# Altium PCB SPT3G_LCBoardRev0.PcbDoc (part 3 of 3)
Units mil, origin at the board's own origin, x right, y up, seen from the top; angles counter-clockwise.
Board outline 7438.98 x 1969 mil, 6 copper layers (Top Layer, Signal Layer 1, Internal Plane 1, Internal Plane 2, Signal Layer 2, Bottom Layer), stack 61.6 mil thick; 29 components, 149 nets, 701 pads, 136 vias.
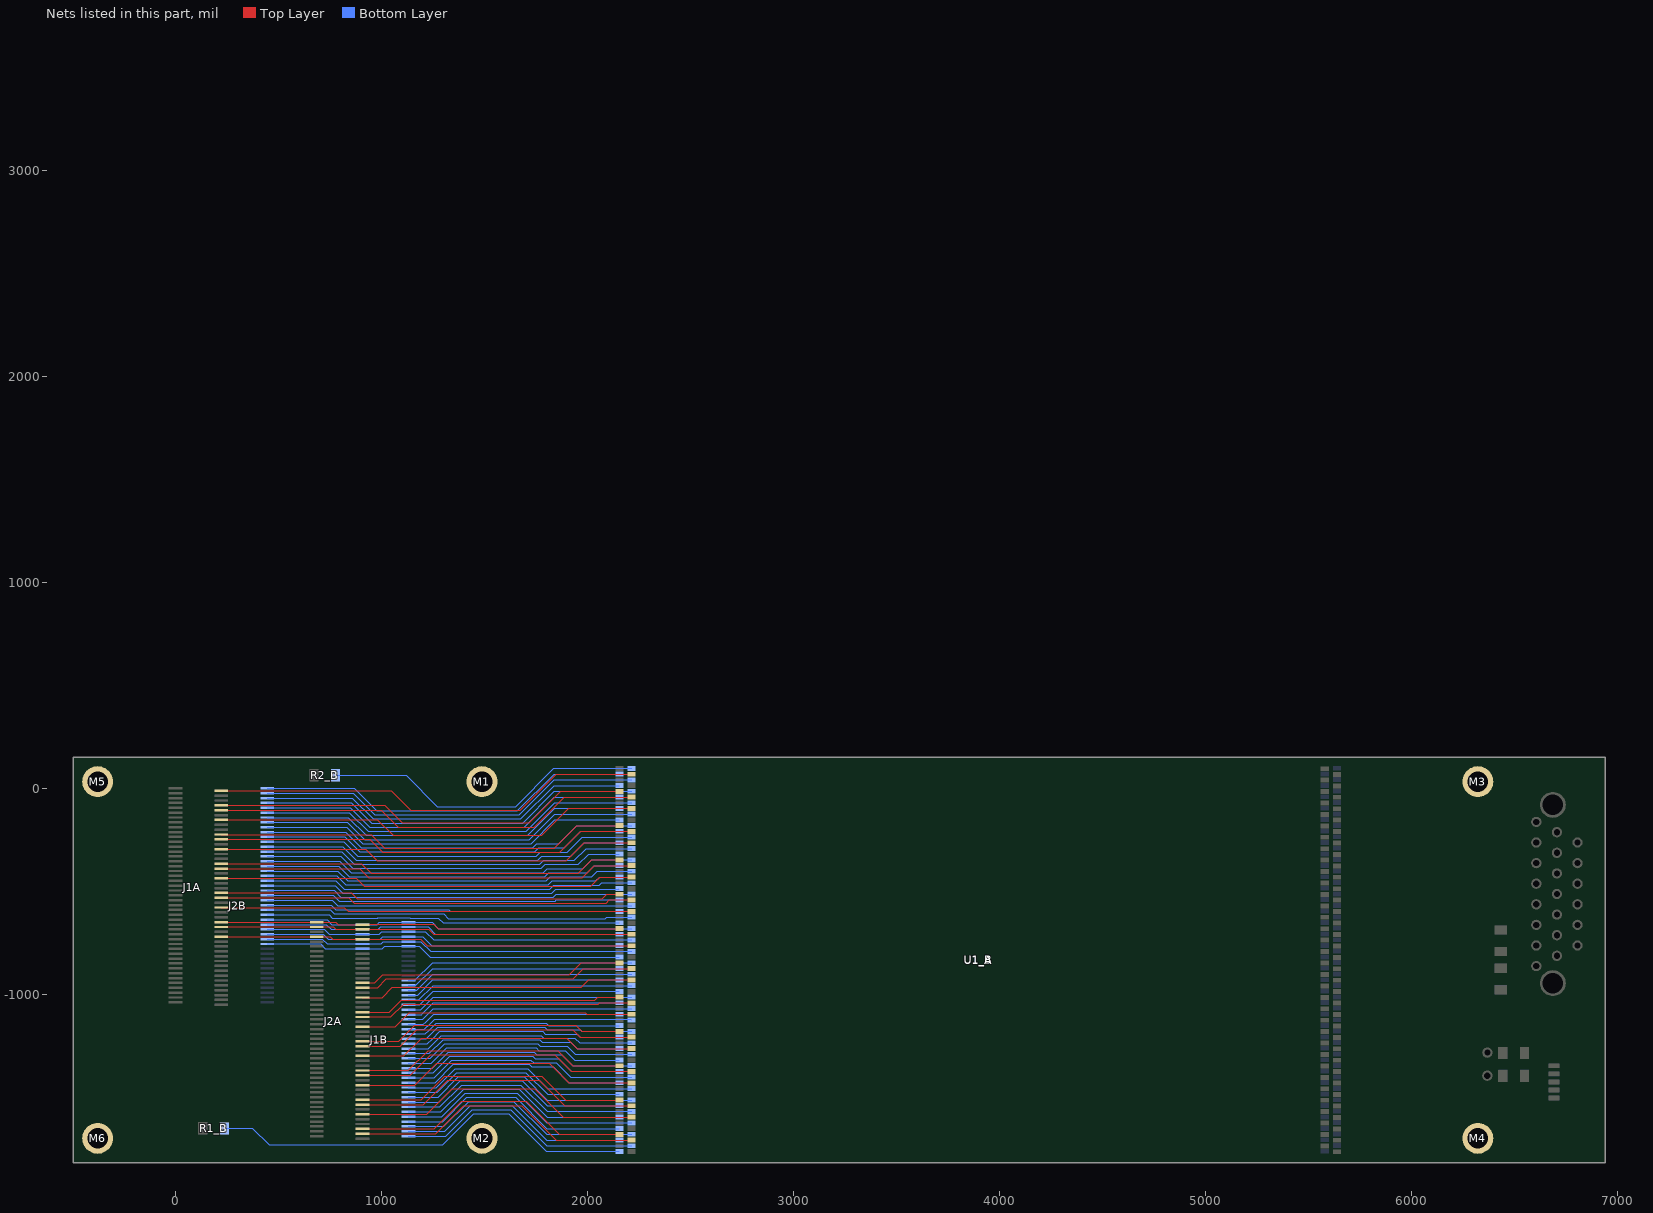
[diagram p7: the nets of this part, all layers, seen from the top]

## Via types
v1: diameter 20, hole 10, Top Layer to Bottom Layer, 136 vias

## Nets (pads, with @x,y where several pads share a name; then routed paths per layer and width w, separated by ;. In a path a pad name is that pad's centre, name@x,y a point inside that pad or via, vN(x,y) a via of type N, cw(c..) or ccw(c..) an arc to the next point about the centre after c; other vN are vias at no path point) (continued)
FREQA35: J1A.22 U1_A.12 | length 2059.8
  Top Layer w6: J1A.22@222.44,-248.03 942.53,-248.03 1005.5,-311.01 1864.88,-311.01 1966.89,-209 U1_A.12@2213.86,-209
FREQA36: J2A.32 U1_A.38 | length 1340.7
  Top Layer w6: J2A.32@908.43,-1015.75 1003.26,-1015.75 1052.32,-966.69 1969.58,-966.69 2005.61,-930.65 U1_A.38@2213.86,-930.65
FREQA37: J1A.34 U1_A.18 | length 2033.9
  Top Layer w6: J1A.34@222.44,-389.76 894.19,-389.76 938.38,-433.95 1975.72,-433.95 2034.13,-375.54 U1_A.18@2213.86,-375.54
FREQA38: J2A.44 U1_A.44 | length 1336.7
  Top Layer w6: J2A.44@908.43,-1157.48 1066.87,-1157.48 1134.72,-1089.63 1990,-1089.63 1997.56,-1097.19 U1_A.44@2213.86,-1097.19
FREQA39: J1A.14 U1_A.8 | length 2077
  Top Layer w6: J1A.14@222.44,-153.54 980.61,-153.54 1056.11,-229.05 1777.38,-229.05 1908.45,-97.98 U1_A.8@2213.86,-97.98
FREQA40: J1A.62 J2A.7 J2A.8 U1_A.32 | length 2009.5
  Top Layer w6: J1A.62@222.44,-720.47 J2A.7@685.98,-720.47 751.98,-720.47 763.79,-732.28 1190.68,-732.28 1222.51,-764.12 U1_A.32@2213.86,-764.12
FREQA41: J2A.68 U1_A.56 | length 1388.3
  Top Layer w6: J2A.68@908.43,-1440.94 1162.41,-1440.94 1267.84,-1335.51 1815.7,-1335.51 1910.45,-1430.26 U1_A.56@2213.86,-1430.26
FREQA42: J2A.80 U1_A.62 | length 1414.2
  Top Layer w6: J2A.80@908.43,-1582.68 1220.3,-1582.68 1344.52,-1458.45 1744.28,-1458.45 1882.62,-1596.8 U1_A.62@2213.86,-1596.8
FREQA43: J1A.58 J2A.3 J2A.4 U1_A.30 | length 2006.1
  Top Layer w6: J1A.58@222.44,-673.23 J2A.3@685.98,-673.23 766.95,-673.23 778.76,-685.04 J2A.4@908.43,-685.04 1229.12,-685.04 1252.68,-708.61 U1_A.30@2213.86,-708.61
FREQA44: J2A.56 U1_A.50 | length 1362.5
  Top Layer w6: J2A.56@908.43,-1299.21 1108.66,-1299.21 1195.3,-1212.57 1899.57,-1212.57 1950.72,-1263.72 U1_A.50@2213.86,-1263.72
FREQA45: J1A.10 U1_A.6 | length 2085.6
  Top Layer w6: J1A.10@222.44,-106.3 999.23,-106.3 1081,-188.07 1742.62,-188.07 1888.22,-42.46 U1_A.6@2213.86,-42.46
FREQA46: J2A.28 U1_A.36 | length 1344.1
  Top Layer w6: J2A.28@908.43,-968.5 981.37,-968.5 1024.16,-925.71 1930.3,-925.71 1980.87,-875.14 U1_A.36@2213.86,-875.14
FREQA47: J2A.40 U1_A.42 | length 1333.8
  Top Layer w6: J2A.40@908.43,-1110.24 1045.4,-1110.24 1106.99,-1048.65 2053.03,-1048.65 2060,-1041.68 U1_A.42@2213.86,-1041.68
FREQA48: J1A.38 U1_A.20 | length 2025.3
  Top Layer w6: J1A.38@222.44,-437.01 877.8,-437.01 915.72,-474.93 2015.01,-474.93 2058.89,-431.05 U1_A.20@2213.86,-431.05
FREQA49: J2A.52 U1_A.48 | length 1353.9
  Top Layer w6: J2A.52@908.43,-1251.97 1090.9,-1251.97 1171.28,-1171.59 1929.23,-1171.59 1965.85,-1208.21 U1_A.48@2213.86,-1208.21
FREQA50: J1A.46 U1_A.24 | length 2008.1
  Top Layer w6: J1A.46@222.44,-531.5 841.68,-531.5 867.07,-556.89 2091.26,-556.89 2106.08,-542.07 U1_A.24@2213.86,-542.07
FREQA51: J1A.2@222.44,-11.81 U1_A.2 | length 2102.8
  Top Layer w6: J1A.2@222.44,-11.81 1047.08,-11.81 1141.38,-106.11 1673.08,-106.11 1847.75,68.56 U1_A.2@2213.86,68.56
FREQA52: J2A.64 U1_A.54 | length 1379.7
  Top Layer w6: J2A.64@908.43,-1393.7 1139.65,-1393.7 1238.82,-1294.53 1841.47,-1294.53 1921.69,-1374.75 U1_A.54@2213.86,-1374.75
FREQA53: J1A.50 U1_A.26 | length 1999.2
  Top Layer w6: J1A.50@222.44,-578.74 819.15,-578.74 837.99,-597.58 U1_A.26@2213.86,-597.58
FREQA54: J2A.86 U1_A.65 | length 1368.1
  Top Layer w6: J2A.86@908.43,-1653.54 1255.06,-1653.54 1388.67,-1519.92 1703.09,-1519.92 1863.23,-1680.06 U1_A.65@2154.8,-1680.06
FREQA55: J1A.56 J2A.1 J2A.2@908.43,-661.42 U1_A.29 | length 1947
  Top Layer w6: J1A.56@222.44,-649.61 J2A.1@685.98,-649.61 777.32,-649.61 789.13,-661.42 J2A.2@908.43,-661.42 910.5,-659.34 1254.06,-659.34 1275.57,-680.85 U1_A.29@2154.8,-680.85
FREQA56: J2A.74 U1_A.59 | length 1342.2
  Top Layer w6: J2A.74@908.43,-1511.81 1193.54,-1511.81 1308.37,-1396.98 1777.09,-1396.98 1893.64,-1513.53 U1_A.59@2154.8,-1513.53
FREQA57: J2A.76 U1_A.60 | length 1405.6
  Top Layer w6: J2A.76@908.43,-1535.43 1202.6,-1535.43 1320.56,-1417.47 1766.07,-1417.47 1889.88,-1541.28 U1_A.60@2213.86,-1541.28
FREQA58: J1A.20 U1_A.11 | length 2005
  Top Layer w6: J1A.20@222.44,-224.41 949.38,-224.41 1015.49,-290.52 1839.63,-290.52 1948.91,-181.24 U1_A.11@2154.8,-181.24
FREQA59: J1A.26 U1_A.14 | length 2051.1
  Top Layer w6: J1A.26@222.44,-295.28 923.46,-295.28 980.17,-351.99 1896.8,-351.99 1984.28,-264.51 U1_A.14@2213.86,-264.51
FREQA60: J2A.50 U1_A.47 | length 1290.5
  Top Layer w6: J2A.50@908.43,-1228.35 1084.52,-1228.35 1161.77,-1151.1 1943.57,-1151.1 1972.92,-1180.46 U1_A.47@2154.8,-1180.46
FREQA61: J1A.32 U1_A.17 | length 1979.2
  Top Layer w6: J1A.32@222.44,-366.14 902.34,-366.14 949.66,-413.46 1954.5,-413.46 2020.17,-347.78 U1_A.17@2154.8,-347.78
FREQA62: J2A.38 U1_A.41 | length 1276.5
  Top Layer w6: J2A.38@908.43,-1086.61 1037.28,-1086.61 1095.73,-1028.16 2034.66,-1028.16 2048.9,-1013.92 U1_A.41@2154.8,-1013.92
FREQA63: J2A.62 U1_A.53 | length 1316.4
  Top Layer w6: J2A.62@908.43,-1370.08 1130.79,-1370.08 1226.83,-1274.04 1856,-1274.04 1928.95,-1346.99 U1_A.53@2154.8,-1346.99
FREQA64: J2A.88 U1_A.66 | length 1431.4
  Top Layer w6: J2A.88@908.43,-1677.17 1263.37,-1677.17 1400.12,-1540.41 1680.63,-1540.41 1848.03,-1707.82 U1_A.66@2213.86,-1707.82
FREQA65: J1A.8 U1_A.5 | length 2030.8
  Top Layer w6: J1A.8@222.44,-82.68 1015.8,-82.68 1100.7,-167.58 1230,-167.58 1520,-167.58 1718.01,-167.58 1870.87,-14.71 U1_A.5@2154.8,-14.71
FREQA66: J1A.44 U1_A.23 | length 1953.3
  Top Layer w6: J1A.44@222.44,-507.87 852.66,-507.87 881.19,-536.4 2071.15,-536.4 2093.23,-514.31 U1_A.23@2154.8,-514.31
FREQA67: J2A.26 U1_A.35 | length 1286.8
  Top Layer w6: J2A.26@908.43,-944.88 967.64,-944.88 1007.3,-905.22 1912.36,-905.22 1970.2,-847.39 U1_A.35@2154.8,-847.39
FREQB0: J2B.46 U1_B.45 | length 1725.1
  Bottom Layer w6: J2B.46@444.88,-519.69 764.99,-519.69 794.2,-548.9 1842.63,-548.9 1849.47,-542.07 U1_B.45@2155,-542.07
FREQB1: J1B.89 J1B.90 J2B.36 U1_B.40 | length 1798.3
  Bottom Layer w6: J2B.36@444.88,-637.8 735.94,-637.8 759.56,-661.42 J1B.89@908.43,-661.42 ; J1B.89@910.5,-659.34 J1B.89@908.43,-661.42 ; J1B.90@1130.87,-649.61 1129.63,-650.84 989.23,-650.84 978.66,-661.42 J1B.89@908.43,-661.42 ; J1B.90@1131.91,-650.65 1245.37,-650.65 1275.57,-680.85 U1_B.40@2214.06,-680.85
FREQB2: J1B.24 U1_B.13 | length 1097.9
  Bottom Layer w6: J1B.24@1130.87,-1429.13 1260.42,-1429.13 1348.86,-1340.7 1717.66,-1340.7 1730.03,-1353.07 1833.26,-1353.07 1910.45,-1430.26 U1_B.13@2155,-1430.26
FREQB3: J1B.52 U1_B.27 | length 1047.6
  Bottom Layer w6: J1B.52@1130.87,-1098.43 1194.54,-1098.43 1198.17,-1094.8 1198.77,-1094.8 1251.9,-1041.68 U1_B.27@2155,-1041.68
FREQB4: J1B.64 U1_B.33 | length 1057.9
  Bottom Layer w6: J1B.64@1130.87,-956.69 1167.18,-956.69 1248.73,-875.14 U1_B.33@2155,-875.14
FREQB5: J2B.72 U1_B.58 | length 1845.4
  Bottom Layer w6: J2B.72@444.88,-212.6 825.59,-212.6 901.9,-288.9 1734.94,-288.9 1754.6,-269.24 1860.91,-269.24 1948.91,-181.24 U1_B.58@2214.06,-181.24
FREQB6: J1B.30 U1_B.16 | length 1142.8
  Bottom Layer w6: J1B.30@1130.87,-1358.27 1246.43,-1358.27 1324,-1280.7 1742.51,-1280.7 1754.89,-1293.07 1875.02,-1293.07 1928.95,-1346.99 U1_B.16@2214.06,-1346.99
FREQB7: J2B.84 U1_B.64 | length 1873.7
  Bottom Layer w6: J2B.84@444.88,-70.87 853.57,-70.87 951.6,-168.9 1685.23,-168.9 1839.43,-14.71 U1_B.64@2214.06,-14.71
FREQB8: J1B.4 U1_B.3 | length 1145
  Bottom Layer w6: J1B.4@1130.87,-1665.35 1307.04,-1665.35 1431.7,-1540.7 1634.82,-1540.7 1801.94,-1707.82 U1_B.3@2155,-1707.82
FREQB9: J1B.16 U1_B.9 | length 1116.7
  Bottom Layer w6: J1B.16@1130.87,-1523.62 1279.07,-1523.62 1381.99,-1420.7 1684.52,-1420.7 1805.11,-1541.28 U1_B.9@2155,-1541.28
FREQB10: J2B.78 U1_B.61 | length 1800.5
  Bottom Layer w6: J2B.78@444.88,-141.73 839.58,-141.73 926.75,-228.9 1710.09,-228.9 1841.01,-97.98 U1_B.61@2155,-97.98
FREQB11: J1B.83 J1B.84 J2B.30 U1_B.37 | length 1742.9
  Bottom Layer w6: J2B.30@444.88,-708.66 717.5,-708.66 741.12,-732.28 J1B.83@908.43,-732.28 993.12,-732.28 1004.93,-720.47 J1B.84@1130.87,-720.47 1199.42,-720.47 1243.06,-764.12 U1_B.37@2155,-764.12
FREQB12: J1B.12 U1_B.7 | length 1126.1
  Bottom Layer w6: J1B.12@1130.87,-1570.87 1288.39,-1570.87 1398.56,-1460.7 1667.96,-1460.7 1804.05,-1596.8 U1_B.7@2155,-1596.8
FREQB13: J1B.36 U1_B.19 | length 1069.6
  Bottom Layer w6: J1B.36@1130.87,-1287.4 1232.45,-1287.4 1299.15,-1220.7 1767.37,-1220.7 1779.74,-1233.07 1920.07,-1233.07 1950.72,-1263.72 U1_B.19@2155,-1263.72
FREQB14: J2B.42 U1_B.43 | length 1722.4
  Bottom Layer w6: J2B.42@444.88,-566.93 755.66,-566.93 778.56,-589.83 965.39,-589.83 ; 965.61,-589.61 1155.72,-589.61 ; 1155.94,-589.83 1326.98,-589.83 1334.73,-597.58 U1_B.43@2155,-597.58
FREQB15: J2B.54 U1_B.49 | length 1743.9
  Bottom Layer w6: J2B.54@444.88,-425.2 783.63,-425.2 827.34,-468.9 1809.5,-468.9 1828.68,-449.72 2040.22,-449.72 2058.89,-431.05 U1_B.49@2155,-431.05
FREQB16: J1B.40 U1_B.21 | length 1060.2
  Bottom Layer w6: J1B.40@1130.87,-1240.16 1222.52,-1240.16 1247.87,-1214.8 1248.48,-1214.8 1282.58,-1180.7 1783.94,-1180.7 1796.31,-1193.07 1950.7,-1193.07 1965.85,-1208.21 U1_B.21@2155,-1208.21
FREQB17: J2B.66 U1_B.55 | length 1772.2
  Bottom Layer w6: J2B.66@444.88,-283.46 811.61,-283.46 877.05,-348.9 1759.79,-348.9 1778.98,-329.72 1919.07,-329.72 1984.28,-264.51 U1_B.55@2155,-264.51
FREQB18: J1B.48 U1_B.25 | length 1044.2
  Bottom Layer w6: J1B.48@1130.87,-1145.67 1203.87,-1145.67 1214.73,-1134.8 1215.34,-1134.8 1252.96,-1097.19 U1_B.25@2155,-1097.19
FREQB19: J1B.60 U1_B.31 | length 1054.5
  Bottom Layer w6: J1B.60@1130.87,-1003.94 1176.5,-1003.94 1249.79,-930.65 U1_B.31@2155,-930.65
FREQB20: J2B.90 U1_B.67 | length 1828.7
  Bottom Layer w6: J2B.90@444.88,0 867.55,0 976.46,-108.9 1660.38,-108.9 1837.84,68.56 U1_B.67@2155,68.56
FREQB21: J2B.58 U1_B.51 | length 1753.3
  Bottom Layer w6: J2B.58@444.88,-377.95 792.96,-377.95 843.91,-428.9 1792.93,-428.9 1812.11,-409.72 1999.95,-409.72 2034.13,-375.54 U1_B.51@2155,-375.54
FREQB22: J1B.6 U1_B.4 | length 1199.3
  Bottom Layer w6: J1B.6@1130.87,-1641.73 1302.38,-1641.73 1423.42,-1520.7 1643.1,-1520.7 1802.47,-1680.06 U1_B.4@2214.06,-1680.06
FREQB23: J1B.54 U1_B.28 | length 1108.4
  Bottom Layer w6: J1B.54@1130.87,-1074.8 1190.49,-1074.8 1251.37,-1013.92 U1_B.28@2214.06,-1013.92
FREQB24: J1B.18 U1_B.10 | length 1171.1
  Bottom Layer w6: J1B.18@1130.87,-1500 1274.41,-1500 1373.71,-1400.7 1692.81,-1400.7 1805.64,-1513.53 U1_B.10@2214.06,-1513.53
FREQB25: J1B.28 U1_B.15 | length 1088.4
  Bottom Layer w6: J1B.28@1130.87,-1381.89 1251.1,-1381.89 1332.29,-1300.7 1734.23,-1300.7 1746.6,-1313.07 1860.01,-1313.07 1921.69,-1374.75 U1_B.15@2155,-1374.75
FREQB26: J1B.87 J1B.88 J2B.34 U1_B.39 | length 1739.4
  Bottom Layer w6: J2B.34@444.88,-661.42 731.28,-661.42 754.9,-685.04 J1B.87@908.43,-685.04 983.42,-685.04 995.23,-673.23 J1B.88@1130.87,-673.23 1226.41,-673.23 1261.79,-708.61 U1_B.39@2155,-708.61
FREQB27: J2B.82 U1_B.63 | length 1809.9
  Bottom Layer w6: J2B.82@444.88,-94.49 848.91,-94.49 943.32,-188.9 1693.52,-188.9 1839.96,-42.46 U1_B.63@2155,-42.46
FREQB28: J1B.66 U1_B.34 | length 1118.7
  Bottom Layer w6: J1B.66@1130.87,-933.07 1162.52,-933.07 1248.2,-847.39 U1_B.34@2214.06,-847.39
FREQB29: J2B.48 U1_B.46 | length 1788.8
  Bottom Layer w6: J2B.48@444.88,-496.06 769.65,-496.06 802.49,-528.9 1834.35,-528.9 1848.94,-514.31 U1_B.46@2214.06,-514.31
FREQB30: J2B.70 U1_B.57 | length 1781.6
  Bottom Layer w6: J2B.70@444.88,-236.22 820.93,-236.22 893.61,-308.9 1743.22,-308.9 1762.88,-289.24 1886.65,-289.24 1966.89,-209 U1_B.57@2155,-209
FREQB31: J1B.42 U1_B.22 | length 1114.5
  Bottom Layer w6: J1B.42@1130.87,-1216.54 1217.85,-1216.54 1239.59,-1194.8 1240.19,-1194.8 1274.3,-1160.7 1792.22,-1160.7 1804.59,-1173.07 1965.53,-1173.07 1972.92,-1180.46 U1_B.22@2214.06,-1180.46
FREQB32: J2B.60 U1_B.52 | length 1817.1
  Bottom Layer w6: J2B.60@444.88,-354.33 797.62,-354.33 852.19,-408.9 1784.64,-408.9 1803.83,-389.72 1978.24,-389.72 2020.17,-347.78 U1_B.52@2214.06,-347.78
FREQB33: R1_B.2 U1_B.1 | length 2089.5
  Bottom Layer w6: R1_B.2@237.39,-1650.63 373.33,-1650.63 454.57,-1731.87 1297.1,-1731.87 1448.27,-1580.7 1618.25,-1580.7 1800.88,-1763.33 U1_B.1@2155,-1763.33
FREQB34: R2_B.2 U1_B.68 | length 1576.7
  Bottom Layer w6: R2_B.2@777.1,63.2 1119.29,63.2 1271.4,-88.9 1652.1,-88.9 1837.31,96.32 U1_B.68@2214.06,96.32
FREQB35: J1B.22 U1_B.12 | length 1161.6
  Bottom Layer w6: J1B.22@1130.87,-1452.76 1265.08,-1452.76 1357.14,-1360.7 1709.38,-1360.7 1806.7,-1458.02 U1_B.12@2214.06,-1458.02
FREQB36: J1B.85 J1B.86 J2B.32 U1_B.38 | length 1800.2
  Bottom Layer w6: J2B.32@444.88,-685.04 723.17,-685.04 746.79,-708.66 J1B.85@908.43,-708.66 988.46,-708.66 1000.27,-696.85 J1B.86@1130.87,-696.85 1213.1,-696.85 1252.61,-736.36 U1_B.38@2214.06,-736.36
FREQB37: J1B.34 U1_B.18 | length 1133.4
  Bottom Layer w6: J1B.34@1130.87,-1311.02 1237.11,-1311.02 1307.44,-1240.7 1759.08,-1240.7 1771.46,-1253.07 1901.61,-1253.07 1940.02,-1291.48 U1_B.18@2214.06,-1291.48
FREQB38: J2B.44 U1_B.44 | length 1780.3
  Bottom Layer w6: J2B.44@444.88,-543.31 760.32,-543.31 786.84,-569.83 957.11,-569.83 957.33,-569.61 1164,-569.61 1164.22,-569.83 U1_B.44@2214.06,-569.83
FREQB39: J1B.14 U1_B.8 | length 1180.5
  Bottom Layer w6: J1B.14@1130.87,-1547.24 1283.73,-1547.24 1390.28,-1440.7 1676.24,-1440.7 1804.58,-1569.04 U1_B.8@2214.06,-1569.04
FREQB40: J1B.62 U1_B.32 | length 1115.3
  Bottom Layer w6: J1B.62@1130.87,-980.31 1171.84,-980.31 1249.26,-902.9 U1_B.32@2214.06,-902.9
FREQB41: J2B.68 U1_B.56 | length 1835.9
  Bottom Layer w6: J2B.68@444.88,-259.84 816.27,-259.84 885.33,-328.9 1751.51,-328.9 1770.69,-309.72 1903.06,-309.72 1976.02,-236.76 U1_B.56@2214.06,-236.76
FREQB42: J2B.80 U1_B.62 | length 1864.2
  Bottom Layer w6: J2B.80@444.88,-118.11 844.24,-118.11 935.04,-208.9 1701.8,-208.9 1840.48,-70.22 U1_B.62@2214.06,-70.22
FREQB43: J1B.58 U1_B.30 | length 1111.8
  Bottom Layer w6: J1B.58@1130.87,-1027.56 1181.16,-1027.56 1250.31,-958.41 U1_B.30@2214.06,-958.41
FREQB44: J2B.56 U1_B.50 | length 1807.7
  Bottom Layer w6: J2B.56@444.88,-401.57 788.3,-401.57 835.63,-448.9 1801.21,-448.9 1820.4,-429.72 2021.97,-429.72 2048.4,-403.29 U1_B.50@2214.06,-403.29
FREQB45: J1B.10 U1_B.6 | length 1189.9
  Bottom Layer w6: J1B.10@1130.87,-1594.49 1293.06,-1594.49 1406.85,-1480.7 1659.67,-1480.7 1803.53,-1624.55 U1_B.6@2214.06,-1624.55
FREQB46: J1B.81 J1B.82 J2B.28 U1_B.36 | length 1803.6
  Bottom Layer w6: J2B.28@444.88,-732.28 712.33,-732.28 735.95,-755.91 J1B.81@908.43,-755.91 997.78,-755.91 1009.59,-744.09 J1B.82@1130.87,-744.09 1190.45,-744.09 1238.23,-791.87 U1_B.36@2214.06,-791.87
FREQB47: J2B.40 U1_B.42 | length 1790
  Bottom Layer w6: J2B.40@444.88,-590.55 751,-590.55 770.28,-609.83 973.68,-609.83 973.9,-609.61 1147.43,-609.61 ; 1147.66,-609.83 1301.54,-609.83 1324.21,-632.5 2087.22,-632.5 2094.71,-625.01 U1_B.42@2213.72,-625.01 ; U1_B.42@2214.06,-625.34 U1_B.42@2213.72,-625.01 ; U1_B.42@2214.06,-625.01 U1_B.42@2213.72,-625.01
FREQB48: J1B.38 U1_B.20 | length 1123.9
  Bottom Layer w6: J1B.38@1130.87,-1263.78 1227.18,-1263.78 1256.16,-1234.8 1256.76,-1234.8 1290.87,-1200.7 1775.65,-1200.7 1788.02,-1213.07 1939.46,-1213.07 1962.36,-1235.97 U1_B.20@2214.06,-1235.97
FREQB49: J2B.52 U1_B.48 | length 1798.2
  Bottom Layer w6: J2B.52@444.88,-448.82 778.97,-448.82 819.06,-488.9 1817.78,-488.9 1836.97,-469.72 2058.2,-469.72 2069.11,-458.8 U1_B.48@2214.06,-458.8
FREQB50: J1B.46 U1_B.24 | length 1104.9
  Bottom Layer w6: J1B.46@1130.87,-1169.29 1208.53,-1169.29 1223.02,-1154.8 1223.63,-1154.8 1257.73,-1120.7 2210.14,-1120.7 U1_B.24@2214.06,-1124.61
FREQB51: J1B.2@1130.87,-1688.98 U1_B.2 | length 1208.8
  Bottom Layer w6: J1B.2@1130.87,-1688.98 1311.71,-1688.98 1439.98,-1560.7 1626.54,-1560.7 1801.41,-1735.57 U1_B.2@2214.06,-1735.57
FREQB52: J2B.64 U1_B.54 | length 1826.5
  Bottom Layer w6: J2B.64@444.88,-307.09 806.95,-307.09 868.76,-368.9 1768.08,-368.9 1787.26,-349.72 1936.53,-349.72 1993.98,-292.27 U1_B.54@2214.06,-292.27
FREQB53: J1B.50 U1_B.26 | length 1105
  Bottom Layer w6: J1B.50@1130.87,-1122.05 1199.21,-1122.05 1206.45,-1114.8 1207.06,-1114.8 1252.43,-1069.43 U1_B.26@2214.06,-1069.43
FREQB54: J2B.86 U1_B.65 | length 1819.3
  Bottom Layer w6: J2B.86@444.88,-47.24 858.23,-47.24 959.89,-148.9 1676.95,-148.9 1838.9,13.05 U1_B.65@2155,13.05
FREQB55: J1B.56 U1_B.29 | length 1051.1
  Bottom Layer w6: J1B.56@1130.87,-1051.18 1185.83,-1051.18 1250.84,-986.17 U1_B.29@2155,-986.17
FREQB56: J2B.74 U1_B.59 | length 1791
  Bottom Layer w6: J2B.74@444.88,-188.98 830.26,-188.98 910.18,-268.9 1726.65,-268.9 1842.07,-153.49 U1_B.59@2155,-153.49
FREQB57: J2B.76 U1_B.60 | length 1854.8
  Bottom Layer w6: J2B.76@444.88,-165.35 834.92,-165.35 918.47,-248.9 1718.37,-248.9 1841.54,-125.73 U1_B.60@2214.06,-125.73
FREQB58: J1B.20 U1_B.11 | length 1107.3
  Bottom Layer w6: J1B.20@1130.87,-1476.38 1269.75,-1476.38 1365.43,-1380.7 1701.09,-1380.7 1806.17,-1485.77 U1_B.11@2155,-1485.77
FREQB59: J1B.26 U1_B.14 | length 1152.2
  Bottom Layer w6: J1B.26@1130.87,-1405.51 1255.76,-1405.51 1340.57,-1320.7 1725.95,-1320.7 1738.32,-1333.07 1849.37,-1333.07 1918.8,-1402.5 U1_B.14@2214.06,-1402.5
FREQB60: J2B.50 U1_B.47 | length 1734.5
  Bottom Layer w6: J2B.50@444.88,-472.44 774.31,-472.44 810.77,-508.9 1826.06,-508.9 1845.25,-489.72 2151.84,-489.72 U1_B.47@2155,-486.56
FREQB61: J1B.32 U1_B.17 | length 1079
  Bottom Layer w6: J1B.32@1130.87,-1334.65 1241.77,-1334.65 1315.72,-1260.7 1750.8,-1260.7 1763.17,-1273.07 1893.32,-1273.07 1939.49,-1319.24 U1_B.17@2155,-1319.24
FREQB62: J2B.38 U1_B.41 | length 1726.1
  Bottom Layer w6: J2B.38@444.88,-614.17 746.34,-614.17 761.99,-629.83 981.96,-629.83 982.18,-629.61 1139.15,-629.61 ; 1139.37,-629.83 1276.09,-629.83 1299.36,-653.09 U1_B.41@2155,-653.09
FREQB63: J2B.62 U1_B.53 | length 1762.8
  Bottom Layer w6: J2B.62@444.88,-330.71 802.28,-330.71 860.48,-388.9 1776.36,-388.9 1795.55,-369.72 1956.27,-369.72 2005.97,-320.02 U1_B.53@2155,-320.02
FREQB64: J2B.88 U1_B.66 | length 1883.1
  Bottom Layer w6: J2B.88@444.88,-23.62 862.89,-23.62 968.17,-128.9 1668.67,-128.9 1838.37,40.8 U1_B.66@2214.06,40.8
FREQB65: J1B.8 U1_B.5 | length 1135.6
  Bottom Layer w6: J1B.8@1130.87,-1618.11 1297.72,-1618.11 1415.13,-1500.7 1651.39,-1500.7 1803,-1652.31 U1_B.5@2155,-1652.31
FREQB66: J1B.44 U1_B.23 | length 1051
  Bottom Layer w6: J1B.44@1130.87,-1192.91 1213.19,-1192.91 1231.3,-1174.8 1231.91,-1174.8 1266.02,-1140.7 1800.5,-1140.7 1812.88,-1153.07 2154.63,-1153.07 U1_B.23@2155,-1152.7
FREQB67: J1B.79 J1B.80 J2B.26 U1_B.35 | length 1746.3
  Bottom Layer w6: J2B.26@444.88,-755.91 704.13,-755.91 727.75,-779.53 J1B.79@908.43,-779.53 1004.43,-779.53 1016.24,-767.72 J1B.80@1130.87,-767.72 1184.37,-767.72 1236.29,-819.63 U1_B.35@2155,-819.63
GND: M1.0 M2.0 M3.0 M4.0 M5.0 M6.0
pads on no net: J1.1 J1.2 J1.3 J1.4 J1.5 J1.6 J1.9 J1.10 J1.11 J1.12 J1.13 J1.14 J1.15 J1.16 J1.17 J1.20 J1.21 J1.MH1 J1.MH2 J1A.2@-61.02,90.55 J1A.67 J1A.68 J1A.69 J1A.70 J1A.71 J1A.72 J1A.73 J1A.74 J1A.75 J1A.76 J1A.77 J1A.78 J1A.79 J1A.80 J1A.81 J1A.82 J1A.83 J1A.84 J1A.85 J1A.86 J1A.87 J1A.88 J1A.89 J1A.90 J1B.2@847.4,-1791.34 J1B.67 J1B.68 J1B.69 J1B.70 J1B.71 J1B.72 J1B.73 J1B.74 J1B.75 J1B.76 J1B.77 J1B.78 J2A.2@624.96,-559.06 J2A.13 J2A.14 J2A.15 J2A.16 J2A.17 J2A.18 J2A.19 J2A.20 J2A.21 J2A.22 J2A.23 J2A.24 J2B.1 J2B.2 J2B.3 J2B.4 J2B.5 J2B.6 J2B.7 J2B.8 J2B.9 J2B.10 J2B.11 J2B.12 J2B.13 J2B.14 J2B.15 J2B.16 J2B.17 J2B.18 J2B.19 J2B.20 J2B.21 J2B.22 J2B.23 J2B.24 J3_A.3 J3_A.4 J3_A.5 J3_B.3 J3_B.4 J3_B.5

## Polygon pours and split planes (outlines as drawn)
GND on Internal Plane 1 (split plane): 6922.5,-1798.41 -476.28,-1798.41 -476.28,130.4 6922.5,130.4
GND on Internal Plane 2 (split plane): 6922.5,-1798.41 -476.28,-1798.41 -476.28,130.4 6922.5,130.4

## Keep-outs
Keep-Out Layer:
  lines w1: 2238.61,378.44 3489.25,1629.08 ; 2238.61,438.44 3429.25,1629.08 ; 2238.61,498.44 3369.25,1629.08 ; 2238.61,558.44 3309.25,1629.08 ; 2238.61,618.44 3249.25,1629.08 ; 2238.61,678.44 3189.25,1629.08 ; 2238.61,738.44 3129.25,1629.08 ; 2238.61,798.44 3069.25,1629.08 ; 2238.61,858.44 3009.25,1629.08 ; 2238.61,918.44 2949.25,1629.08 ; 2238.61,978.44 2889.25,1629.08 ; 2238.61,1038.44 2829.25,1629.08 ; 2238.61,1098.44 2769.25,1629.08 ; 2238.61,1158.44 2709.25,1629.08 ; 2238.61,1218.44 2649.25,1629.08 ; 2238.61,1278.44 2589.25,1629.08 ; 2238.61,1338.44 2529.25,1629.08 ; 2238.61,1398.44 2469.25,1629.08 ; 2238.61,1458.44 2409.25,1629.08 ; 2238.61,1518.44 2349.25,1629.08 ; 2238.61,1578.44 2289.25,1629.08 ; 2266.84,346.67 3549.25,1629.08 ; 2326.84,346.67 3609.25,1629.08 ; 2386.84,346.67 3669.25,1629.08 ; 2446.84,346.67 3729.25,1629.08 ; 2506.84,346.67 3789.25,1629.08 ; 2566.84,346.67 3849.25,1629.08 ; 2626.84,346.67 3909.25,1629.08 ; 2686.84,346.67 3969.25,1629.08 ; 2746.84,346.67 4029.25,1629.08 ; 2806.84,346.67 4089.25,1629.08 ; 2866.84,346.67 4149.25,1629.08 ; 2926.84,346.67 4209.25,1629.08 ; 2986.84,346.67 4269.25,1629.08 ; 3046.84,346.67 4329.25,1629.08 ; 3106.84,346.67 4389.25,1629.08 ; 3166.84,346.67 4449.25,1629.08 ; 3226.84,346.67 4509.25,1629.08 ; 3286.84,346.67 4569.25,1629.08 ; 3346.84,346.67 4629.25,1629.08 ; 3406.84,346.67 4689.25,1629.08 ; 3466.84,346.67 4749.25,1629.08 ; 3526.84,346.67 4809.25,1629.08 ; 3586.84,346.67 4869.25,1629.08 ; 3646.84,346.67 4929.25,1629.08 ; 3706.84,346.67 4989.25,1629.08 ; 3766.84,346.67 5049.25,1629.08 ; 3826.84,346.67 5109.25,1629.08 ; 3886.84,346.67 5169.25,1629.08 ; 3946.84,346.67 5229.25,1629.08 ; 4006.84,346.67 5289.25,1629.08 ; 4066.84,346.67 5349.25,1629.08 ; 4126.84,346.67 5409.25,1629.08 ; 4186.84,346.67 5469.25,1629.08 ; 4246.84,346.67 5529.25,1629.08 ; 4306.84,346.67 5589.25,1629.08 ; 4366.84,346.67 5649.25,1629.08 ; 4426.84,346.67 5709.25,1629.08 ; 4486.84,346.67 5769.25,1629.08 ; 4546.84,346.67 5829.25,1629.08 ; 4606.84,346.67 5889.25,1629.08 ; 4666.84,346.67 5949.25,1629.08 ; 4726.84,346.67 6009.25,1629.08 ; 4786.84,346.67 6069.25,1629.08 ; 4846.84,346.67 6129.25,1629.08 ; 4906.84,346.67 6189.25,1629.08 ; 4966.84,346.67 6249.25,1629.08 ; 5026.84,346.67 6309.25,1629.08 ; 5086.84,346.67 6369.25,1629.08 ; 5146.84,346.67 6429.25,1629.08 ; 5206.84,346.67 6489.25,1629.08 ; 5266.84,346.67 6549.25,1629.08 ; 5326.84,346.67 6609.25,1629.08 ; 5386.84,346.67 6669.25,1629.08 ; 5446.84,346.67 6729.25,1629.08 ; 5506.84,346.67 6789.25,1629.08 ; 5566.84,346.67 6849.25,1629.08 ; 5626.84,346.67 6887.38,1607.21 ; 5686.84,346.67 6887.38,1547.21 ; 5746.84,346.67 6887.38,1487.21 ; 5767.7,1678.86 5867.38,1778.54 5987.38,1898.54 6107.38,2018.54 6227.38,2138.54 6347.38,2258.54 6467.38,2378.54 6587.38,2498.54 6707.38,2618.54 6827.38,2738.54 6887.38,2798.54 ; 5767.7,1738.86 5807.38,1778.54 5927.38,1898.54 6047.38,2018.54 6167.38,2138.54 6287.38,2258.54 6407.38,2378.54 6527.38,2498.54 6647.38,2618.54 6767.38,2738.54 6887.38,2858.54 ; 5767.7,1798.86 5867.38,1898.54 5987.38,2018.54 6107.38,2138.54 6227.38,2258.54 6347.38,2378.54 6467.38,2498.54 6587.38,2618.54 6707.38,2738.54 6827.38,2858.54 6887.38,2918.54 ; 5767.7,1858.86 5807.38,1898.54 5927.38,2018.54 6047.38,2138.54 6167.38,2258.54 6287.38,2378.54 6407.38,2498.54 6527.38,2618.54 6647.38,2738.54 6767.38,2858.54 6887.38,2978.54 ; 5767.7,1918.86 5867.38,2018.54 5987.38,2138.54 6107.38,2258.54 6227.38,2378.54 6347.38,2498.54 6467.38,2618.54 6587.38,2738.54 6707.38,2858.54 6827.38,2978.54 6887.38,3038.54 ; 5767.7,1978.86 5807.38,2018.54 5927.38,2138.54 6047.38,2258.54 6167.38,2378.54 6287.38,2498.54 6407.38,2618.54 6527.38,2738.54 6647.38,2858.54 6767.38,2978.54 6887.38,3098.54 ; 5767.7,2038.86 5867.38,2138.54 5987.38,2258.54 6107.38,2378.54 6227.38,2498.54 6347.38,2618.54 6467.38,2738.54 6587.38,2858.54 6707.38,2978.54 6827.38,3098.54 6887.38,3158.54 ; 5767.7,2098.86 5807.38,2138.54 5927.38,2258.54 6047.38,2378.54 6167.38,2498.54 6287.38,2618.54 6407.38,2738.54 6527.38,2858.54 6647.38,2978.54 6767.38,3098.54 6887.38,3218.54 ; 5767.7,2158.86 5867.38,2258.54 5987.38,2378.54 6107.38,2498.54 6227.38,2618.54 6347.38,2738.54 6467.38,2858.54 6587.38,2978.54 6707.38,3098.54 6827.38,3218.54 6887.38,3278.54 ; 5767.7,2218.86 5807.38,2258.54 5927.38,2378.54 6047.38,2498.54 6167.38,2618.54 6287.38,2738.54 6407.38,2858.54 6527.38,2978.54 6647.38,3098.54 6767.38,3218.54 6887.38,3338.54 ; 5767.7,2278.86 5867.38,2378.54 5987.38,2498.54 6107.38,2618.54 6227.38,2738.54 6347.38,2858.54 6467.38,2978.54 6587.38,3098.54 6707.38,3218.54 6827.38,3338.54 6887.38,3398.54 ; 5767.7,2338.86 5807.38,2378.54 5927.38,2498.54 6047.38,2618.54 6167.38,2738.54 6287.38,2858.54 6407.38,2978.54 6527.38,3098.54 6647.38,3218.54 6767.38,3338.54 6887.38,3458.54 ; 5767.7,2398.86 5867.38,2498.54 5987.38,2618.54 6107.38,2738.54 6227.38,2858.54 6347.38,2978.54 6467.38,3098.54 6587.38,3218.54 6707.38,3338.54 6827.38,3458.54 ; 5767.7,2458.86 5807.38,2498.54 5927.38,2618.54 6047.38,2738.54 6167.38,2858.54 6287.38,2978.54 6407.38,3098.54 6527.38,3218.54 6647.38,3338.54 6767.38,3458.54 ; 5767.7,2518.86 5867.38,2618.54 5987.38,2738.54 6107.38,2858.54 6227.38,2978.54 6347.38,3098.54 6467.38,3218.54 6587.38,3338.54 6707.38,3458.54 ; 5767.7,2578.86 5807.38,2618.54 5927.38,2738.54 6047.38,2858.54 6167.38,2978.54 6287.38,3098.54 6407.38,3218.54 6527.38,3338.54 6647.38,3458.54 ; 5767.7,2638.86 5867.38,2738.54 5987.38,2858.54 6107.38,2978.54 6227.38,3098.54 6347.38,3218.54 6467.38,3338.54 6587.38,3458.54 ; 5767.7,2698.86 5807.38,2738.54 5927.38,2858.54 6047.38,2978.54 6167.38,3098.54 6287.38,3218.54 6407.38,3338.54 6527.38,3458.54 ; 5767.7,2758.86 5867.38,2858.54 5987.38,2978.54 6107.38,3098.54 6227.38,3218.54 6347.38,3338.54 6467.38,3458.54 ; 5767.7,2818.86 5807.38,2858.54 5927.38,2978.54 6047.38,3098.54 6167.38,3218.54 6287.38,3338.54 6407.38,3458.54 ; 5767.7,2878.86 5867.38,2978.54 5987.38,3098.54 6107.38,3218.54 6227.38,3338.54 6347.38,3458.54 ; 5767.7,2938.86 5807.38,2978.54 5927.38,3098.54 6047.38,3218.54 6167.38,3338.54 6287.38,3458.54 ; 5767.7,2998.86 5867.38,3098.54 5987.38,3218.54 6107.38,3338.54 6227.38,3458.54 ; 5767.7,3058.86 5807.38,3098.54 5927.38,3218.54 6047.38,3338.54 6167.38,3458.54 ; 5767.7,3118.86 5867.38,3218.54 5987.38,3338.54 6107.38,3458.54 ; 5767.7,3178.86 5807.38,3218.54 5927.38,3338.54 6047.38,3458.54 ; 5767.7,3238.86 5867.38,3338.54 5987.38,3458.54 ; 5767.7,3298.86 5807.38,3338.54 5927.38,3458.54 ; 5767.7,3358.86 5867.38,3458.54 ; 5767.7,3418.86 5807.38,3458.54 ; 5806.84,346.67 6887.38,1427.21 ; 5807.38,1658.54 5927.38,1778.54 6047.38,1898.54 6167.38,2018.54 6287.38,2138.54 6407.38,2258.54 6527.38,2378.54 6647.38,2498.54 6767.38,2618.54 6887.38,2738.54 ; 5866.84,346.67 6887.38,1367.21 ; 5867.38,1658.54 5987.38,1778.54 6107.38,1898.54 6227.38,2018.54 6347.38,2138.54 6467.38,2258.54 6587.38,2378.54 6707.38,2498.54 6827.38,2618.54 6887.38,2678.54 ; 5926.84,346.67 6887.38,1307.21 ; 5927.38,1658.54 6047.38,1778.54 6167.38,1898.54 6287.38,2018.54 6407.38,2138.54 6527.38,2258.54 6647.38,2378.54 6767.38,2498.54 6887.38,2618.54 ; 5986.84,346.67 6887.38,1247.21 ; 5987.38,1658.54 6107.38,1778.54 6227.38,1898.54 6347.38,2018.54 6467.38,2138.54 6587.38,2258.54 6707.38,2378.54 6827.38,2498.54 6887.38,2558.54 ; 6046.84,346.67 6887.38,1187.21 ; 6047.38,1658.54 6167.38,1778.54 6287.38,1898.54 6407.38,2018.54 6527.38,2138.54 6647.38,2258.54 6767.38,2378.54 6887.38,2498.54 ; 6106.84,346.67 6887.38,1127.21 ; 6107.38,1658.54 6227.38,1778.54 6347.38,1898.54 6467.38,2018.54 6587.38,2138.54 6707.38,2258.54 6827.38,2378.54 6887.38,2438.54 ; 6166.84,346.67 6887.38,1067.21 ; 6167.38,1658.54 6287.38,1778.54 6407.38,1898.54 6527.38,2018.54 6647.38,2138.54 6767.38,2258.54 6887.38,2378.54 ; 6226.84,346.67 6887.38,1007.21 ; 6227.38,1658.54 6347.38,1778.54 6467.38,1898.54 6587.38,2018.54 6707.38,2138.54 6827.38,2258.54 6887.38,2318.54 ; 6286.84,346.67 6887.38,947.21 ; 6287.38,1658.54 6407.38,1778.54 6527.38,1898.54 6647.38,2018.54 6767.38,2138.54 6887.38,2258.54 ; 6346.84,346.67 6887.38,887.21 ; 6347.38,1658.54 6467.38,1778.54 6587.38,1898.54 6707.38,2018.54 6827.38,2138.54 6887.38,2198.54 ; 6406.84,346.67 6887.38,827.21 ; 6407.38,1658.54 6527.38,1778.54 6647.38,1898.54 6767.38,2018.54 6887.38,2138.54 ; 6466.84,346.67 6887.38,767.21 ; 6467.38,1658.54 6587.38,1778.54 6707.38,1898.54 6827.38,2018.54 6887.38,2078.54 ; 6526.84,346.67 6887.38,707.21 ; 6527.38,1658.54 6647.38,1778.54 6767.38,1898.54 6887.38,2018.54 ; 6586.84,346.67 6887.38,647.21 ; 6587.38,1658.54 6707.38,1778.54 6827.38,1898.54 6887.38,1958.54 ; 6646.84,346.67 6887.38,587.21 ; 6647.38,1658.54 6767.38,1778.54 6887.38,1898.54 ; 6706.84,346.67 6887.38,527.21 ; 6707.38,1658.54 6827.38,1778.54 6887.38,1838.54 ; 6766.84,346.67 6887.38,467.21 ; 6767.38,1658.54 6887.38,1778.54 ; 6826.84,346.67 6887.38,407.21 ; 6827.38,1658.54 6887.38,1718.54
  lines w15: 2238.61,1778.54 2648.53,1778.54 3688.24,1778.54 4548,1778.54 5197.84,1778.54 5767.7,1778.54 6887.38,1778.54 ; 2238.61,1898.54 2648.53,1898.54 3688.24,1898.54 4548,1898.54 5197.84,1898.54 5767.7,1898.54 6887.38,1898.54 ; 2238.61,2018.54 2648.53,2018.54 3688.24,2018.54 4548,2018.54 5197.84,2018.54 5767.7,2018.54 6887.38,2018.54 ; 2238.61,2138.54 2648.53,2138.54 3688.24,2138.54 4548,2138.54 5197.84,2138.54 5767.7,2138.54 6887.38,2138.54 ; 2238.61,2258.54 2648.53,2258.54 3688.24,2258.54 4548,2258.54 5197.84,2258.54 5767.7,2258.54 6887.38,2258.54 ; 2238.61,2378.54 2648.53,2378.54 3688.24,2378.54 4548,2378.54 5197.84,2378.54 5767.7,2378.54 6887.38,2378.54 ; 2238.61,2498.54 2648.53,2498.54 3688.24,2498.54 4548,2498.54 5197.84,2498.54 5767.7,2498.54 6887.38,2498.54 ; 2238.61,2618.54 2648.53,2618.54 3688.24,2618.54 4548,2618.54 5197.84,2618.54 5767.7,2618.54 6887.38,2618.54 ; 2238.61,2738.54 2648.53,2738.54 3688.24,2738.54 4548,2738.54 5197.84,2738.54 5767.7,2738.54 6887.38,2738.54 ; 2238.61,2858.54 2648.53,2858.54 3688.24,2858.54 4548,2858.54 5197.84,2858.54 5767.7,2858.54 6887.38,2858.54 ; 2238.61,2978.54 2648.53,2978.54 3688.24,2978.54 4548,2978.54 5197.84,2978.54 5767.7,2978.54 6887.38,2978.54 ; 2238.61,3098.54 2648.53,3098.54 3688.24,3098.54 4548,3098.54 5197.84,3098.54 5767.7,3098.54 6887.38,3098.54 ; 2238.61,3218.54 2648.53,3218.54 3688.24,3218.54 4548,3218.54 5197.84,3218.54 5767.7,3218.54 6887.38,3218.54 ; 2238.61,3338.54 2648.53,3338.54 3688.24,3338.54 4548,3338.54 5197.84,3338.54 5767.7,3338.54 6887.38,3338.54 ; 2238.61,3458.54 6887.38,3458.54 ; 2648.53,3578.54 2648.53,1658.54 ; 3688.24,3578.54 3688.24,1658.54 ; 4548,3578.54 4548,1658.54 ; 5197.84,3578.54 5197.84,1658.54 ; 5767.7,3578.54 5767.7,1658.54 ; 2648.53,1658.54 3688.24,1658.54 ; 2648.53,1658.54 2238.61,1658.54 2238.61,3578.54 6887.38,3578.54 6887.38,1658.54 5767.7,1658.54 ; 3688.24,1658.54 4548,1658.54 ; 4548,1658.54 5197.84,1658.54 ; 5197.84,1658.54 5767.7,1658.54 ; 2238.61,347.21 2238.61,1628.54 6887.38,1628.54 6887.38,347.21 2238.61,347.21
  text "Layer" at 2298.61,3488.54 h60
  text "Name" at 2708.53,3488.54 h60
  text "Material" at 3748.24,3488.54 h60
  text "Thickness" at 4608,3488.54 h60
  text "Constant" at 5257.84,3488.54 h60
  text "Board Layer Stack" at 5827.7,3488.54 h60
  text "1" at 2298.61,3368.54 h60
  text "Top Overlay" at 2708.53,3368.54 h60
  text "2" at 2298.61,3248.54 h60
  text "Top Solder" at 2708.53,3248.54 h60
  text "Solder Resist" at 3748.24,3248.54 h60
  text "0.40mil" at 4608,3248.54 h60
  text "3.5" at 5257.84,3248.54 h60
  text "3" at 2298.61,3128.54 h60
  text "Top Layer" at 2708.53,3128.54 h60
  text "Copper" at 3748.24,3128.54 h60
  text "1.40mil" at 4608,3128.54 h60
  text "4" at 2298.61,3008.54 h60
  text "Dielectric 1" at 2708.53,3008.54 h60
  text "FR-4" at 3748.24,3008.54 h60
  text "4.00mil" at 4608,3008.54 h60
  text "4.2" at 5257.84,3008.54 h60
  text "5" at 2298.61,2888.54 h60
  text "Signal Layer 1" at 2708.53,2888.54 h60
  text "Copper" at 3748.24,2888.54 h60
  text "0.70mil" at 4608,2888.54 h60
  text "6" at 2298.61,2768.54 h60
  text "Dielectric 3" at 2708.53,2768.54 h60
  text "9.00mil" at 4608,2768.54 h60
  text "4.2" at 5257.84,2768.54 h60
  text "7" at 2298.61,2648.54 h60
  text "Internal Plane 1" at 2708.53,2648.54 h60
  text "Copper" at 3748.24,2648.54 h60
  text "0.70mil" at 4608,2648.54 h60
  text "8" at 2298.61,2528.54 h60
  text "Dielectric 4" at 2708.53,2528.54 h60
  text "30.00mil" at 4608,2528.54 h60
  text "4.2" at 5257.84,2528.54 h60
  text "9" at 2298.61,2408.54 h60
  text "Internal Plane 2" at 2708.53,2408.54 h60
  text "Copper" at 3748.24,2408.54 h60
  text "0.70mil" at 4608,2408.54 h60
  text "10" at 2298.61,2288.54 h60
  text "Dielectric 5" at 2708.53,2288.54 h60
  text "9.00mil" at 4608,2288.54 h60
  text "4.2" at 5257.84,2288.54 h60
  text "11" at 2298.61,2168.54 h60
  text "Signal Layer 2" at 2708.53,2168.54 h60
  text "Copper" at 3748.24,2168.54 h60
  text "0.70mil" at 4608,2168.54 h60
  text "12" at 2298.61,2048.54 h60
  text "Dielectric 2" at 2708.53,2048.54 h60
  text "4.00mil" at 4608,2048.54 h60
  text "4.2" at 5257.84,2048.54 h60
  text "13" at 2298.61,1928.54 h60
  text "Bottom Layer" at 2708.53,1928.54 h60
  text "Copper" at 3748.24,1928.54 h60
  text "1.40mil" at 4608,1928.54 h60
  text "14" at 2298.61,1808.54 h60
  text "Bottom Solder" at 2708.53,1808.54 h60
  text "Solder Resist" at 3748.24,1808.54 h60
  text "0.40mil" at 4608,1808.54 h60
  text "3.5" at 5257.84,1808.54 h60
  text "15" at 2298.61,1688.54 h60
  text "Bottom Overlay" at 2708.53,1688.54 h60

## Other copper
Top Layer:
  rectangle net BOLORETURN_A: 6421.43,-1396.59 6467.44,-1285.09
  rectangle net COMB_A: 6403.44,-894.27 6460,-772.94
  text "Top Layer" at 5952.93,3129.86 h60
  text "100 Ohm - Differential" at 2385.42,1461.28 h60
  text "Top layer and Mid layer 1 - 6mil parallel traces over ground plane 1" at 2553.98,1330.79 h60
  text "Bottom layer and Mid layer 2 - 6mil parallel traces over ground plane 2" at 2553.98,1194.86 h60
  text "50 Ohm - single ended" at 2369.11,1058.92 h60
  text "Mid layer 1 - 12mil traces" at 2581.17,901.24 h60
  text "Mid layer 2 - 12mil traces" at 2573,778.68 h60
Signal Layer 1:
  text "Mid Layer 1" at 5952.11,2881.72 h60
Signal Layer 2:
  text "Mid Layer 2" at 5924.92,2158.55 h60
Bottom Layer:
  region net BOLORETURN_B: 6467.73,-1284.85 6421.72,-1284.85 6421.72,-1396.35 6467.73,-1396.35
  rectangle net COMB_B: 6403.44,-894.27 6460,-772.94
  text "Bottom Layer" at 5969.24,1917.33 h60
Internal Plane 1 (plane layer: these items are gaps in the copper):
  text "Ground Plane 1 (Gnd)" at 5767.45,2646.62 h60
Internal Plane 2 (plane layer: these items are gaps in the copper):
  text "Ground Plane 2 (Gnd)" at 5767.45,2391.07 h60

## Silkscreen, mask and mechanical layers (free items; w line width, h text height)
Top Overlay:
  text "Top Silk" at 6050.19,3364.35 h60
  text "1" at -111.16,48 h60
  text "1" at 589.6,-591.09 h60
  text "adamjohngilbert@gmail.com" at 477.49,-1703.14 h60 r90
  text "SPT3G LC Board Rev0" at 380.62,-1704.55 h60 r90
  text "Amy Bender" at 428.35,-1707.36 h60 r90
Bottom Overlay:
  text "Bottom Silk" at 6017.56,1684.22 h60
  text "1" at 111.34,-1104.05 h60 r180
  text "adamjohngilbert@gmail.com" at -130.31,-1658.54 h60 r270
  text "SPT3G LC Board Rev0" at -33.43,-1659.94 h60 r270
  text "Amy Bender" at -81.17,-1662.75 h60 r270
  text "1" at 802.79,-1738.29 h60 r180
Mechanical 2:
  lines w10: 1354.06,-1635.23 1374.06,-1695.23 ; 1354.06,-23.23 1374.06,36.77 ; 1364.06,-1695.23 1384.06,-1695.23 ; 1364.06,36.77 1384.06,36.77 ; 1374.06,-1105.15 1374.06,-1695.23 ; 1374.06,-553.32 1374.06,36.77 ; 1394.06,-1635.23 1374.06,-1695.23 ; 1394.06,-23.23 1374.06,36.77
  text "1732 (mil)" at 1410.05,-1095.15 h60 r90
Mechanical 3:
  rectangle: 2120.6,-1799.21 2249.25,126.06
  rectangle: 5545.79,-1800.21 5674.45,125.06
  text "NO TOP SIDE TINNING IN HIGHLIGHTED REGIONS" at 682.22,449.69 h100
Mechanical 4:
  rectangle: 5545.79,-1800.21 5674.45,125.06
  rectangle: 2120.59,-1799.21 2249.25,126.06
  text "NO BOTTOM SIDE TINNING IN HIGHLIGHTED REGIONS" at 682.22,446.49 h100

## Dimensions
6323.6,32.5 to -496.38,150.5 on Mechanical 2
6512.24,29.83 to 6323.6,32.5 on Mechanical 2
-496.38,-1818.5 to 1487.9,-1699.5 on Mechanical 2
1487.9,-1699.5 to 1182.05,-1783.46 on Mechanical 2
-496.38,150.5 to 6942.6,150.5 on Mechanical 2
6942.6,-1818.5 to 6942.6,150.5 on Mechanical 2
636.77,-1783.46 to -49.21,-1133.86 on Mechanical 2
-49.21,-1133.86 to 636.77,-1783.46 on Mechanical 2